# Altium PCB LED6432Clock.PcbDoc (part 5 of 6)
Units mm, origin at the board's own origin, x right, y up, seen from the top; angles counter-clockwise.
Board outline 152.4 x 101.6 mm, 2 copper layers (Top Layer, Bottom Layer); 48 components, 0 nets, 638 pads, 127 vias.
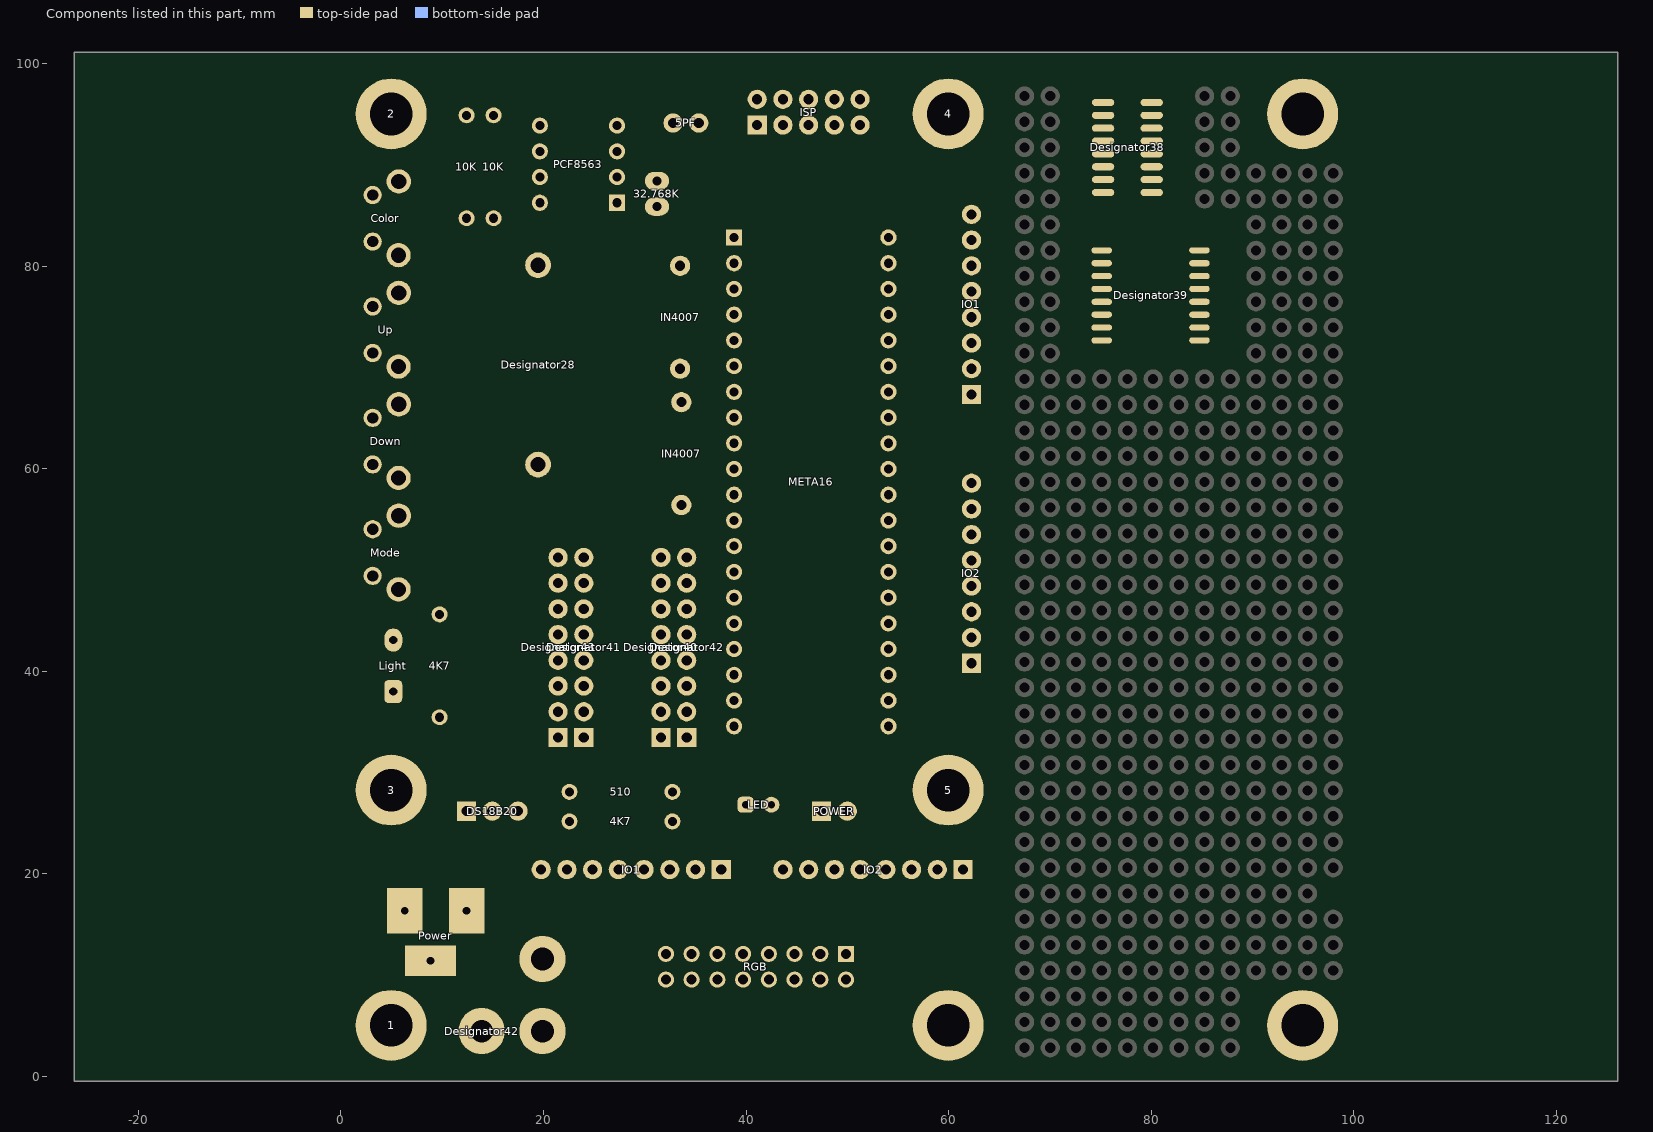
[diagram p5: the components of this part, seen from the top]

## Via types
v1: diameter 0.6, hole 0.3, Top Layer to Bottom Layer, 67 vias
v2: diameter 1.27, hole 0.711, Top Layer to Bottom Layer, 60 vias

## Nets (pads, with @x,y where several pads share a name; then routed paths per layer and width w, separated by ;. In a path a pad name is that pad's centre, name@x,y a point inside that pad or via, vN(x,y) a via of type N, cw(c..) or ccw(c..) an arc to the next point about the centre after c; other vN are vias at no path point) (continued)
copper on no net: (continued)
  Bottom Layer w0.16: 2.673,82.474 cw(c3.651,82.363) 3.396,83.314 ; 2.832,82.456 cw(c3.901,82.335) 3.623,83.374 ; 2.986,49.901 ccw(c2.629,51.09) 3.829,50.771 ; 2.991,82.438 cw(c4.152,82.307) 3.85,83.435 ; 3.019,50.073 ccw(c2.888,50.836) 3.635,50.635 ; 3.033,49.748 ccw(c2.726,50.768) 3.755,50.494 ; 3.046,49.915 ccw(c2.934,50.565) 3.571,50.394 ; 3.063,49.589 ccw(c2.548,50.868) 3.892,50.559 ; 3.079,49.595 ccw(c2.823,50.446) 3.682,50.218 ; 3.121,49.44 ccw(c2.324,50.999) 4.04,50.65 ; 3.123,49.441 ccw(c2.688,50.522) 3.823,50.26 ; 3.13,60.422 4.152,60.422 ; 3.13,82.422 3.13,82.617 4.265,83.751 ; 3.168,50.242 ccw(c3.179,50.489) 3.419,50.425 ccw(c3.67,50.358) 3.54,50.133 ; 3.194,49.298 ccw(c2.518,50.621) 3.974,50.325 ; 3.224,71.61 4.316,71.61 ; 3.257,49.422 3.257,50.333 ; 3.267,49.155 ccw(c2.711,50.242) 3.908,49.999 ; 3.298,49.173 ccw(c2.228,50.767) 4.121,50.453 ; 3.387,49.04 ccw(c2.511,50.344) 4.061,50.087 ; 3.476,48.908 ccw(c2.795,49.922) 4,49.722 ; 3.601,50.506 ccw(c4.553,50.25) 3.701,49.754 ; 3.752,50.485 ccw(c4.581,50.264) 3.84,49.834 ; 3.785,50.096 ccw(c4.093,50.025) 3.825,49.857 ; v1(12.698,70.543) 16.94,74.785 17.702,74.785 17.803,74.887 36.904,74.887 37.227,75.209 ; v1(14.501,76.081) 15.009,76.589 35.634,76.589 36.795,77.749 38.817,77.749 40.107,77.749 ; v1(14.704,62.339) 14.704,62.415 15.035,62.746 ; v1(17.422,46.083) 17.498,46.159 21.435,46.159 ; 19.64,91.338 20.656,91.338 ; 19.64,93.878 21.9,93.878 24.128,91.651 24.128,85.326 25.322,84.132 32.942,84.132 36.015,87.206 39.444,87.206 v1(51.534,87.206) ; 19.681,20.035 cw(c19.45,19.015) 20.46,19.286 ; 19.696,20.197 cw(c19.253,18.849) 20.627,19.2 ; 19.717,20.191 cw(c19.516,19.307) 20.391,19.542 ; 19.72,19.867 cw(c19.667,19.249) 20.267,19.41 ; 19.74,20.351 cw(c19.028,18.715) 20.77,19.103 ; 19.746,20.349 cw(c19.361,19.178) 20.555,19.482 ; 19.767,20.415 19.767,19.755 21.971,17.551 25.705,17.551 29.616,13.64 v1(40.919,13.64) ; 19.796,20.501 cw(c19.469,19.506) 20.483,19.765 ; 19.803,20.498 cw(c19.183,19.071) 20.702,19.41 ; 19.867,20.645 cw(c19.338,19.428) 20.633,19.717 ; 19.899,20.628 cw(c18.828,18.89) 20.84,19.235 ; 19.982,20.764 cw(c19.075,19.292) 20.78,19.584 ; 20.066,20.901 cw(c19.323,19.694) 20.72,19.933 ; 20.285,19.34 cw(c21.196,19.584) 20.381,20.058 ; 20.44,19.363 cw(c21.226,19.573) 20.521,19.98 ; 20.485,19.759 cw(c20.757,19.828) 20.515,19.971 ; 21.435,51.239 21.435,51.849 ; 22.307,20.415 22.307,19.374 ; v1(22.528,83.472) 23.417,83.472 24.28,82.608 v1(26.312,82.608) ; v1@23.671,54.668 24.458,54.668 35.101,54.668 37.006,56.573 37.006,58.377 37.361,58.732 40.739,58.732 v1(40.765,58.707) ; 24.847,20.415 24.847,19.653 25.781,18.72 ; v1(25.347,73.922) 37.717,73.922 37.768,73.972 39.723,73.972 43.63,73.972 v1(43.764,73.838) ; v1(27.1,78.875) 31.037,78.875 31.443,78.468 34.288,78.468 37.26,81.44 37.564,81.44 37.691,81.567 45.388,81.567 v1(45.515,81.44) ; 27.387,20.415 27.387,18.129 30.099,15.418 39.319,15.418 39.599,15.697 42.266,15.697 43.383,14.58 43.993,14.58 44.221,14.58 44.729,14.072 v1(48.311,14.072) ; v1@27.811,81.288 27.811,81.135 27.963,80.983 30.605,80.983 31.824,82.202 34.389,82.202 37.412,85.225 47.166,85.225 v1(47.597,84.793) ; v1(29.386,81.872) 30.427,81.872 31.367,82.812 33.805,82.812 36.904,85.91 v1(48.69,85.91) ; 29.927,20.415 29.927,17.024 29.927,16.402 30.353,15.977 39.065,15.977 39.294,16.205 42.799,16.205 43.637,15.367 ; v1@32.36,16.713 v1(32.467,16.821) 32.467,20.415 ; 33.678,36.339 cw(c34.932,35.408) 34.703,36.953 ; 33.787,36.215 cw(c34.869,35.546) 34.65,36.799 ; 33.806,36.244 cw(c35.371,35.083) 35.086,37.01 ; 33.923,36.131 cw(c35.275,35.295) 35.001,36.861 ; 33.935,36.148 cw(c35.81,34.757) 35.468,37.067 ; 34.033,19.69 cw(c35.53,19.439) 34.814,20.777 ; 34.055,36.04 cw(c35.175,35.471) 34.936,36.705 ; 34.059,36.047 cw(c35.681,35.044) 35.352,36.922 ; 34.087,20.012 cw(c35.336,19.802) 34.738,20.918 ; 34.135,35.999 35.151,35.999 ; 34.135,38.539 35.355,38.539 ; 34.135,41.079 35.177,41.079 ; 34.19,19.378 ccw(c33.888,20.77) 35.246,20.34 ; 34.198,35.968 cw(c35.545,35.283) 35.258,36.767 ; 34.34,35.895 cw(c35.915,35.096) 35.579,36.829 ; 34.349,35.914 cw(c35.427,35.481) 35.181,36.616 ; 34.46,19.437 ccw(c34.191,20.674) 35.398,20.292 ; 34.497,35.854 cw(c35.765,35.345) 35.476,36.68 ; 34.502,36.607 ccw(c34.994,37.422) 35.223,36.498 ; 34.509,35.886 cw(c35.336,35.636) 35.129,36.475 ; 34.585,36.744 ccw(c35.277,37.889) 35.598,36.59 ; 34.606,36.531 ccw(c35.085,37.072) 35.272,36.374 ; 34.606,36.731 ccw(c35.039,37.403) 35.208,36.622 ; 34.622,36.72 ccw(c34.766,36.933) 34.815,36.681 ; 34.626,12.09 34.626,11.475 35.255,10.846 ; 34.662,35.84 cw(c35.649,35.541) 35.402,36.542 ; 34.676,35.897 cw(c35.207,35.796) 35.067,36.319 ; 34.73,19.495 ccw(c34.495,20.578) 35.551,20.243 ; 34.833,35.867 cw(c35.485,35.744) 35.313,36.385 ; v1(34.874,18.237) 50.863,18.237 51.263,18.637 ; 34.969,36.247 ccw(c35.078,36.28) 35.108,36.17 ccw(c35.144,36.036) 35.005,36.031 ; 35.007,20.415 35.007,20.377 33.68,19.05 ; v1(36.498,82.735) 36.498,83.345 37.742,84.59 45.642,84.59 v1(46.556,83.675) ; v1(36.752,79.433) 36.091,79.433 34.745,78.087 34.745,77.833 16.076,77.833 10.158,83.751 4.265,83.751 ; v1(37.16,16.739) 35.204,16.739 34.519,16.739 33.68,17.577 33.68,19.05 ; v1(37.412,63.812) 10.869,63.812 8.862,61.806 8.862,61.603 8.862,55.938 3.257,50.333 ; 38.547,83.124 cw(c39.499,82.086) 39.56,83.493 ; 38.763,82.888 cw(c39.524,82.059) 39.573,83.183 ; 38.817,37.109 48.108,37.109 52.045,41.046 52.045,45.06 53.01,46.025 59.411,46.025 61.798,48.412 62.255,48.412 ; 38.817,39.649 46.203,39.649 46.558,40.005 48.311,40.005 50.902,42.596 50.902,48.235 51.232,48.565 58.674,48.565 61.062,50.952 ; 38.817,42.189 42.459,42.189 v1(42.644,42.375) 45.179,42.375 45.273,42.469 48.946,42.469 50.038,43.561 50.038,50.19 50.952,51.105 58.877,51.105 61.265,53.492 ; 38.817,44.729 38.911,44.635 v1(41.781,44.635) 41.799,44.653 47.879,44.653 48.844,44.653 48.87,44.679 48.87,53.086 49.403,53.619 57.937,53.619 60.35,56.032 ; 38.817,65.049 38.85,65.082 v1(42.924,65.082) ; 38.817,67.589 38.85,67.622 v1(43.711,67.622) ; 38.817,72.669 45.482,72.669 v1(45.616,72.804) 45.728,72.804 47.168,74.244 52.807,74.244 53.111,73.939 59.969,73.939 60.985,74.955 ; 38.817,80.289 38.861,80.246 v1(44.295,80.246) 46.805,80.246 47.752,81.194 47.752,81.534 48.184,81.966 52.375,81.966 52.781,81.559 60.452,81.559 ; 38.817,82.829 39.675,82.829 ; v1(38.862,17.323) 39.116,17.577 53.619,17.577 53.803,17.761 53.803,20.415 ; v1@38.9,17.369 ccw(c39.122,17.638) 39.303,17.339 ; v1@38.964,17.518 ccw(c39.139,17.854) 39.329,17.526 ; v1@39.002,17.492 ccw(c39.275,17.823) 39.496,17.456 ; v1@39.075,17.266 cw(c39.396,17.18) 39.23,17.468 ; v1(39.088,88.45) v1(53.846,88.45) ; 39.348,83.316 ccw(c39.657,83.599) 39.639,83.181 ; 39.567,83.338 ccw(c39.512,82.072) 38.655,83.006 cw(c39.868,81.683) 39.946,83.477 ; 39.706,12.09 39.675,12.059 39.675,10.82 ; v1(41.476,32.57) 53.465,32.57 54.057,33.163 ; v1(41.908,38.438) 37.59,38.438 35.151,35.999 ; 42.073,42.29 cw(c42.238,42.005) v1@42.482,42.227 ; 42.245,42.39 cw(c42.388,42.142) v1@42.6,42.334 ; 42.246,12.09 42.246,13.659 ; v1@42.431,42.429 cw(c42.123,42.508) 42.282,42.233 cw(c42.375,42.072) v1@42.498,42.211 ; v1@42.898,61.679 42.441,61.222 ; 42.922,13.99 cw(c42.753,13.359) v1@43.353,13.616 ; 42.945,20.415 43.643,20.415 ; 43.24,13.905 cw(c43.138,13.524) v1@43.501,13.679 ; 43.271,73.877 ccw(c43.384,74.074) v1@43.577,73.954 ; v1(43.409,13.64) 43.256,13.64 41.859,15.037 39.954,15.037 39.726,14.808 29.972,14.808 26.06,18.72 25.781,18.72 ; 43.414,73.795 ccw(c43.525,73.987) v1@43.713,73.87 ; v1(43.79,78.207) 40.564,78.207 40.107,77.749 ; v1(44.018,15.367) 43.637,15.367 ; v1(44.425,82.575) 45.39,82.575 45.695,82.271 47.371,82.271 49.505,84.404 58.293,84.404 v1(59.411,83.287) ; 45.033,81.473 ccw(c45.14,81.658) v1@45.324,81.55 ; 45.123,72.765 cw(c45.236,72.568) v1@45.429,72.688 ; 45.172,81.393 ccw(c45.278,81.577) v1@45.463,81.47 ; 45.266,72.847 cw(c45.377,72.655) v1@45.565,72.772 ; v1(45.337,43.467) 37.564,43.467 35.177,41.079 ; v1@45.523,72.839 cw(c45.867,72.71) 45.772,73.066 ; 45.617,41.048 cw(c45.838,40.681) v1@46.111,41.011 ; v1@45.672,72.783 cw(c46.224,72.577) 46.072,73.146 ; 45.784,40.978 cw(c45.974,40.65) v1@46.149,40.986 ; 45.81,41.164 cw(c45.991,40.865) v1@46.213,41.135 ; 45.883,41.036 ccw(c45.717,41.324) v1@46.039,41.238 ; v1(46.251,41.181) 45.997,40.927 37.742,40.927 35.355,38.539 ; v1(46.355,16.612) 46.38,16.586 v1@48.133,16.586 ; v1(46.683,76.843) 47.902,76.843 48.537,77.478 50.671,77.478 50.943,77.749 54.057,77.749 ; v1(47.75,75.115) 53.963,75.115 54.057,75.209 ; v1(47.928,73.312) 53.415,73.312 54.057,72.669 ; v1(48.69,81.008) 50.341,81.008 51.059,80.289 54.057,80.289 ; 48.937,11.308 cw(c50.09,10.999) 49.85,12.169 ; 49.004,11.558 cw(c50.032,11.283) 49.818,12.326 ; v1(49.071,55.024) 53.923,55.024 54.057,54.889 ; v1@49.071,78.494 v1(49.071,78.316) 46.464,78.316 45.499,77.351 40.765,77.351 39.901,76.487 38.047,76.487 36.802,76.487 36.142,75.827 16.127,75.827 13.206,72.906 12.672,72.906 11.301,71.534 11.301,67.572 4.152,60.422 ; 49.071,11.809 cw(c49.974,11.567) 49.786,12.482 ; 49.084,11.161 ccw(c48.775,12.314) 49.945,12.074 ; 49.334,11.228 ccw(c49.059,12.256) 50.102,12.042 ; 49.585,11.295 ccw(c49.343,12.198) 50.258,12.01 ; v1(50.95,52.205) 53.913,52.205 54.057,52.349 ; v1@51.128,79.129 v1(51.026,79.027) 37.895,79.027 37.437,79.027 37.133,78.722 36.472,78.722 35.304,77.554 34.999,77.249 9.955,77.249 9.65,76.944 4.316,71.61 ; v1(51.153,85.885) 50.417,86.622 50.417,86.672 39.825,86.672 39.723,86.571 36.472,86.571 33.348,83.447 24.458,83.447 22.959,84.945 22.959,89.035 20.656,91.338 ; 51.263,20.415 51.263,18.637 ; 54.057,34.569 54.057,33.163 ; 56.979,20.099 cw(c57.279,19.949) 57.359,20.275 ; 56.979,20.732 ccw(c57.279,20.882) 57.359,20.556 ; 57.038,20.267 cw(c57.392,20.191) 57.306,20.543 ; 57.038,20.564 ccw(c57.392,20.64) 57.306,20.288 ; 57.122,20.027 cw(c57.463,19.857) 57.554,20.228 cw(c57.669,20.699) 57.194,20.598 ; 57.122,20.804 ccw(c57.463,20.974) 57.554,20.603 ccw(c57.669,20.132) 57.194,20.233 ; 57.199,20.255 cw(c57.35,20.227) 57.377,20.378 cw(c57.415,20.59) 57.202,20.556 ; 57.199,20.576 ccw(c57.35,20.604) 57.377,20.453 ccw(c57.415,20.24) 57.202,20.275 ; 59.519,20.099 cw(c59.819,19.949) 59.899,20.275 ; 59.519,20.732 ccw(c59.819,20.882) 59.899,20.556 ; 59.578,20.267 cw(c59.932,20.191) 59.846,20.543 ; 59.578,20.564 ccw(c59.932,20.64) 59.846,20.288 ; 59.662,20.027 cw(c60.003,19.857) 60.094,20.228 cw(c60.209,20.699) 59.734,20.598 ; 59.662,20.804 ccw(c60.003,20.974) 60.094,20.603 ccw(c60.209,20.132) 59.734,20.233 ; 59.739,20.255 cw(c59.89,20.227) 59.917,20.378 cw(c59.955,20.59) 59.742,20.556 ; 59.739,20.576 ccw(c59.89,20.604) 59.917,20.453 ccw(c59.955,20.24) 59.742,20.275 ; 60.796,52.894 cw(c61.123,51.596) 61.81,52.745 ; 60.821,47.322 ccw(c60.375,49.006) 62.036,48.482 ; 60.827,52.661 ccw(c60.491,54.368) 62.049,53.595 ; 60.925,52.424 ccw(c60.58,54.732) 62.456,53.344 ; 60.928,52.809 ccw(c60.637,54.124) 61.892,53.634 ; 60.999,52.945 ccw(c60.749,53.934) 61.728,53.647 ; 61.053,52.569 ccw(c60.724,54.42) 62.332,53.446 ; 61.102,47.397 ccw(c60.703,48.903) 62.189,48.433 ; 61.103,53.114 ccw(c60.942,53.715) 61.555,53.611 ; 61.143,53.124 cw(c61.318,52.472) 61.775,52.969 ; 61.146,52.724 ccw(c60.858,54.186) 62.193,53.524 ; 61.17,52.988 cw(c61.403,52.065) 61.892,52.883 ; 61.175,47.573 ccw(c60.866,48.727) 62.031,48.463 ; 61.184,52.865 cw(c61.357,52.084) 61.788,52.759 ; 61.2,47.342 ccw(c60.861,49.127) 62.478,48.298 ; 61.203,47.74 cw(c61.413,46.954) 61.82,47.659 ccw(c61.677,47.411) 61.603,47.688 ; 61.221,52.873 ccw(c60.973,53.993) 62.041,53.576 ; 61.247,47.898 cw(c62.244,47.63) 62.259,48.662 ; 61.27,53.014 ccw(c61.061,53.843) 61.881,53.602 ; 61.276,47.76 ccw(c61.069,48.536) 61.867,48.453 ; 61.301,48.096 cw(c62.247,47.842) 62.261,48.822 ; 61.307,52.481 ccw(c61.019,54.407) 62.585,53.249 ; 61.314,53.33 ccw(c61.288,53.426) 61.387,53.433 ; 61.344,53.178 ccw(c61.212,53.669) 61.713,53.584 ; 61.383,47.471 ccw(c61.031,48.799) 62.341,48.385 ; 61.401,52.631 ccw(c61.127,54.176) 62.469,53.363 ; 61.423,20.415 58.883,20.415 56.343,20.415 56.343,17.532 55.728,16.916 50.394,16.916 49.866,16.389 49.866,12.09 48.622,10.846 35.255,10.846 ; 61.431,47.641 ccw(c61.158,48.661) 62.187,48.428 ; 61.465,52.787 ccw(c61.225,54.004) 62.336,53.452 ; 61.501,47.82 ccw(c61.316,48.51) 62.027,48.436 ; 61.522,47.403 ccw(c61.23,48.938) 62.62,48.225 ; 61.577,52.809 cw(c61.627,52.556) 61.771,52.77 ; 61.665,47.546 ccw(c61.36,48.695) 62.494,48.337 ; 61.689,52.538 ccw(c61.458,54.082) 62.714,53.153 ; 61.843,47.464 ccw(c61.599,48.749) 62.763,48.153 ; 62.255,50.952 61.062,50.952 ; 62.255,53.492 61.265,53.492 ; 62.255,56.032 60.35,56.032 ; 62.255,74.955 60.985,74.955 ; 62.255,77.495 61.417,77.495 60.427,76.505 ; 62.255,82.575 61.468,82.575 60.452,81.559 ; 62.255,85.115 62.205,85.065 49.327,85.065 47.142,82.88 46.025,82.88 44.958,83.947 40.792,83.947 ; 3.257,50.333 ccw(c3.383,50.333) 3.349,50.213 cw(c3.383,50.333) 3.257,50.333 ; 4.152,60.422 cw(c4.152,60.648) 3.931,60.599 ccw(c4.152,60.648) 4.152,60.422 ; 4.152,60.422 ccw(c4.152,60.197) 3.931,60.245 cw(c4.152,60.197) 4.152,60.422 ; 4.265,83.751 ccw(c5.144,82.872) 3.931,82.601 cw(c5.144,82.872) 4.265,83.751 ; 4.316,71.61 cw(c4.316,72.218) 3.811,71.879 ccw(c4.316,72.218) 4.316,71.61 ; 4.316,71.61 ccw(c4.316,71.229) 3.94,71.29 cw(c4.316,71.229) 4.316,71.61 ; 13.073,70.919 cw(c12.698,71.295) 12.698,70.763 ccw(c12.698,71.295) 13.073,70.919 ; 13.073,70.919 ccw(c13.449,70.543) 12.918,70.543 cw(c13.449,70.543) 13.073,70.919 ; 14.877,76.456 cw(c14.501,76.832) 14.501,76.301 ccw(c14.501,76.832) 14.877,76.456 ; 14.877,76.456 ccw(c15.252,76.081) 14.721,76.081 cw(c15.252,76.081) 14.877,76.456 ; 15.035,62.746 ccw(c15.326,62.454) 14.921,62.379 cw(c15.326,62.454) 15.035,62.746 ; 15.035,62.746 35.837,62.746 37.361,61.222 42.441,61.222 ; 19.335,46.159 cw(c19.335,44.059) 20.82,45.544 ccw(c19.335,44.059) 19.335,46.159 ; 19.335,46.159 ccw(c19.335,48.26) 20.82,46.775 cw(c19.335,48.26) 19.335,46.159 ; 19.721,46.159 cw(c19.721,44.445) 20.933,45.657 ccw(c19.721,44.445) 19.721,46.159 ; 19.721,46.159 ccw(c19.721,47.873) 20.933,46.661 cw(c19.721,47.873) 19.721,46.159 ; 20.108,46.159 cw(c20.108,44.832) 21.046,45.77 ccw(c20.108,44.832) 20.108,46.159 ; 20.108,46.159 ccw(c20.108,47.487) 21.046,46.548 cw(c20.108,47.487) 20.108,46.159 ; 20.606,93.878 cw(c20.606,94.844) 19.923,94.161 ccw(c20.606,94.844) 20.606,93.878 ; 20.606,93.878 ccw(c20.606,92.913) 19.923,93.596 cw(c20.606,92.913) 20.606,93.878 ; 20.656,91.338 cw(c20.656,91.694) 20.32,91.576 ccw(c20.656,91.694) 20.656,91.338 ; 20.656,91.338 ccw(c20.656,90.983) 20.32,91.1 cw(c20.656,90.983) 20.656,91.338 ; 20.992,93.878 cw(c20.992,95.23) 20.036,94.274 ccw(c20.992,95.23) 20.992,93.878 ; 20.992,93.878 ccw(c20.992,92.526) 20.036,93.482 cw(c20.992,92.526) 20.992,93.878 ; 21.379,93.878 cw(c21.379,95.617) 20.15,94.388 ccw(c21.379,95.617) 21.379,93.878 ; 21.379,93.878 ccw(c21.379,92.14) 20.15,93.369 cw(c21.379,92.14) 21.379,93.878 ; 22.307,19.374 cw(c22.496,19.374) 22.462,19.559 ccw(c22.496,19.374) 22.307,19.374 ; 22.307,19.374 ccw(c22.119,19.374) 22.153,19.559 cw(c22.119,19.374) 22.307,19.374 ; 22.307,19.374 23.622,18.059 25.933,18.059 29.82,14.173 40.056,14.173 40.361,14.478 41.427,14.478 42.246,13.659 ; 23.059,83.472 cw(c23.059,84.003) 22.683,83.628 ccw(c23.059,84.003) 23.059,83.472 ; 23.059,83.472 ccw(c23.059,82.941) 22.683,83.316 cw(c23.059,82.941) 23.059,83.472 ; 25.781,18.72 cw(c26.531,19.47) 25.606,19.99 ccw(c26.531,19.47) 25.781,18.72 ; 25.781,82.608 cw(c25.781,82.077) 26.157,82.453 ccw(c25.781,82.077) 25.781,82.608 ; 25.781,82.608 ccw(c25.781,83.14) 26.157,82.764 cw(c25.781,83.14) 25.781,82.608 ; 25.878,73.922 cw(c25.878,74.453) 25.503,74.077 ccw(c25.878,74.453) 25.878,73.922 ; 25.878,73.922 ccw(c25.878,73.39) 25.503,73.766 cw(c25.878,73.39) 25.878,73.922 ; 27.387,18.315 cw(c29.488,18.315) 28.003,19.8 ccw(c29.488,18.315) 27.387,18.315 ; 27.387,18.315 ccw(c25.287,18.315) 26.772,19.8 cw(c25.287,18.315) 27.387,18.315 ; 27.387,18.701 cw(c29.101,18.701) 27.889,19.913 ccw(c29.101,18.701) 27.387,18.701 ; 27.387,18.701 ccw(c25.673,18.701) 26.885,19.913 cw(c25.673,18.701) 27.387,18.701 ; 27.387,19.088 cw(c28.715,19.088) 27.776,20.026 ccw(c28.715,19.088) 27.387,19.088 ; 27.387,19.088 ccw(c26.06,19.088) 26.998,20.026 cw(c26.06,19.088) 27.387,19.088 ; 27.631,78.875 cw(c27.631,79.406) 27.255,79.03 ccw(c27.631,79.406) 27.631,78.875 ; 27.631,78.875 ccw(c27.631,78.343) 27.255,78.719 cw(c27.631,78.343) 27.631,78.875 ; 29.917,81.872 cw(c29.917,82.403) 29.541,82.027 ccw(c29.917,82.403) 29.917,81.872 ; 29.917,81.872 ccw(c29.917,81.341) 29.541,81.716 cw(c29.917,81.341) 29.917,81.872 ; 29.927,18.315 cw(c32.028,18.315) 30.543,19.8 ccw(c32.028,18.315) 29.927,18.315 ; 29.927,18.315 ccw(c27.827,18.315) 29.312,19.8 cw(c27.827,18.315) 29.927,18.315 ; 29.927,18.701 cw(c31.641,18.701) 30.429,19.913 ccw(c31.641,18.701) 29.927,18.701 ; 29.927,18.701 ccw(c28.213,18.701) 29.425,19.913 cw(c28.213,18.701) 29.927,18.701 ; 29.927,19.088 cw(c31.255,19.088) 30.316,20.026 ccw(c31.255,19.088) 29.927,19.088 ; 29.927,19.088 ccw(c28.6,19.088) 29.538,20.026 cw(c28.6,19.088) 29.927,19.088 ; 32.467,17.352 cw(c31.936,17.352) 32.312,16.977 ccw(c31.936,17.352) 32.467,17.352 ; 32.467,17.352 ccw(c32.999,17.352) 32.623,16.977 cw(c32.999,17.352) 32.467,17.352 ; 32.467,18.315 cw(c34.568,18.315) 33.083,19.8 ccw(c34.568,18.315) 32.467,18.315 ; 32.467,18.315 ccw(c30.367,18.315) 31.852,19.8 cw(c30.367,18.315) 32.467,18.315 ; 32.467,18.701 cw(c34.181,18.701) 32.969,19.913 ccw(c34.181,18.701) 32.467,18.701 ; 32.467,18.701 ccw(c30.753,18.701) 31.965,19.913 cw(c30.753,18.701) 32.467,18.701 ; 32.467,19.088 cw(c33.795,19.088) 32.856,20.026 ccw(c33.795,19.088) 32.467,19.088 ; 32.467,19.088 ccw(c31.14,19.088) 32.078,20.026 cw(c31.14,19.088) 32.467,19.088 ; 33.68,19.05 cw(c34.884,17.847) 34.965,19.546 ccw(c34.884,17.847) 33.68,19.05 ; 33.68,19.05 ccw(c32.55,20.18) 34.141,20.333 cw(c32.55,20.18) 33.68,19.05 ; 35.13,38.539 cw(c35.13,38.882) 34.807,38.77 ccw(c35.13,38.882) 35.13,38.539 ; 35.13,38.539 ccw(c35.13,38.197) 34.807,38.309 cw(c35.13,38.197) 35.13,38.539 ; 35.151,35.999 cw(c35.151,36.158) 34.995,36.133 ccw(c35.151,36.158) 35.151,35.999 ; 35.151,35.999 ccw(c35.151,35.841) 34.995,35.866 cw(c35.151,35.841) 35.151,35.999 ; 35.177,41.079 cw(c35.177,41.268) 34.992,41.234 ccw(c35.177,41.268) 35.177,41.079 ; 35.177,41.079 ccw(c35.177,40.891) 34.992,40.925 cw(c35.177,40.891) 35.177,41.079 ; 35.255,10.846 cw(c35.692,11.282) 35.2,11.655 ccw(c35.692,11.282) 35.255,10.846 ; 35.355,38.539 cw(c35.355,38.959) 34.958,38.822 ccw(c35.355,38.959) 35.355,38.539 ; 35.355,38.539 ccw(c35.355,38.12) 34.958,38.257 cw(c35.355,38.12) 35.355,38.539 ; 35.405,18.237 cw(c35.405,18.768) 35.03,18.393 ccw(c35.405,18.768) 35.405,18.237 ; 35.405,18.237 ccw(c35.405,17.706) 35.03,18.082 cw(c35.405,17.706) 35.405,18.237 ; 36.22,79.433 cw(c36.22,78.902) 36.596,79.278 ccw(c36.22,78.902) 36.22,79.433 ; 36.22,79.433 ccw(c36.22,79.965) 36.596,79.589 cw(c36.22,79.965) 36.22,79.433 ; 36.498,83.267 cw(c35.966,83.267) 36.342,82.891 ccw(c35.966,83.267) 36.498,83.267 ; 36.498,83.267 ccw(c37.029,83.267) 36.653,82.891 cw(c37.029,83.267) 36.498,83.267 ; 36.629,16.739 cw(c36.629,16.207) 37.005,16.583 ccw(c36.629,16.207) 36.629,16.739 ; 36.629,16.739 ccw(c36.629,17.27) 37.005,16.894 cw(c36.629,17.27) 36.629,16.739 ; 36.881,63.812 cw(c36.881,63.281) 37.256,63.657 ccw(c36.881,63.281) 36.881,63.812 ; 36.881,63.812 ccw(c36.881,64.344) 37.256,63.968 cw(c36.881,64.344) 36.881,63.812 ; 37.079,77.749 cw(c37.079,76.011) 38.308,77.24 ccw(c37.079,76.011) 37.079,77.749 ; 37.079,77.749 ccw(c37.079,79.488) 38.308,78.259 cw(c37.079,79.488) 37.079,77.749 ; 37.227,75.209 cw(c37.227,73.812) 38.276,74.734 ccw(c37.227,73.812) 37.227,75.209 ; 37.227,75.209 ccw(c37.227,76.607) 38.276,75.685 cw(c37.227,76.607) 37.227,75.209 ; 37.227,75.209 38.817,75.209 46.457,75.209 47.422,76.175 52.883,76.175 53.213,76.505 60.427,76.505 ; 37.465,77.749 cw(c37.465,76.397) 38.421,77.353 ccw(c37.465,76.397) 37.465,77.749 ; 37.465,77.749 ccw(c37.465,79.101) 38.421,78.145 cw(c37.465,79.101) 37.465,77.749 ; 37.58,75.209 cw(c37.58,74.123) 38.397,74.84 ccw(c37.58,74.123) 37.58,75.209 ; 37.58,75.209 ccw(c37.58,76.296) 38.397,75.579 cw(c37.58,76.296) 37.58,75.209 ; 37.852,77.749 cw(c37.852,76.784) 38.535,77.467 ccw(c37.852,76.784) 37.852,77.749 ; 37.852,77.749 ccw(c37.852,78.715) 38.535,78.032 cw(c37.852,78.715) 37.852,77.749 ; 37.934,75.209 cw(c37.934,74.433) 38.517,74.945 ccw(c37.934,74.433) 37.934,75.209 ; 37.934,75.209 ccw(c37.934,75.986) 38.517,75.473 cw(c37.934,75.986) 37.934,75.209 ; 39.62,88.45 cw(c39.62,88.982) 39.244,88.606 ccw(c39.62,88.982) 39.62,88.45 ; 39.62,88.45 ccw(c39.62,87.919) 39.244,88.295 cw(c39.62,87.919) 39.62,88.45 ; 39.675,10.82 cw(c40.404,10.82) 40.053,11.459 ccw(c40.404,10.82) 39.675,10.82 ; 39.675,10.82 ccw(c38.879,10.82) 39.313,11.487 cw(c38.879,10.82) 39.675,10.82 ; 39.675,82.829 cw(c39.675,82.98) 39.527,82.954 ccw(c39.675,82.98) 39.675,82.829 ; 39.675,82.829 ccw(c39.675,82.679) 39.527,82.705 cw(c39.675,82.679) 39.675,82.829 ; 39.675,82.829 40.792,83.947 ; 39.783,37.109 cw(c39.783,38.075) 39.1,37.392 ccw(c39.783,38.075) 39.783,37.109 ; 39.783,37.109 ccw(c39.783,36.144) 39.1,36.827 cw(c39.783,36.144) 39.783,37.109 ; 39.783,39.649 cw(c39.783,40.615) 39.1,39.932 ccw(c39.783,40.615) 39.783,39.649 ; 39.783,39.649 ccw(c39.783,38.684) 39.1,39.367 cw(c39.783,38.684) 39.783,39.649 ; 39.783,42.189 cw(c39.783,43.155) 39.1,42.472 ccw(c39.783,43.155) 39.783,42.189 ; 39.783,42.189 ccw(c39.783,41.224) 39.1,41.907 cw(c39.783,41.224) 39.783,42.189 ; 39.783,72.669 cw(c39.783,73.635) 39.1,72.952 ccw(c39.783,73.635) 39.783,72.669 ; 39.783,72.669 ccw(c39.783,71.704) 39.1,72.387 cw(c39.783,71.704) 39.783,72.669 ; 39.783,75.209 cw(c39.783,76.175) 39.1,75.492 ccw(c39.783,76.175) 39.783,75.209 ; 39.783,75.209 ccw(c39.783,74.244) 39.1,74.927 cw(c39.783,74.244) 39.783,75.209 ; 39.82,77.749 cw(c39.82,78.367) 39.294,78.043 ccw(c39.82,78.367) 39.82,77.749 ; 39.82,77.749 ccw(c39.82,77.132) 39.294,77.456 cw(c39.82,77.132) 39.82,77.749 ; 40.107,77.749 cw(c40.107,78.544) 39.43,78.127 ccw(c40.107,78.544) 40.107,77.749 ; 40.107,77.749 ccw(c40.107,76.955) 39.43,77.372 cw(c40.107,76.955) 40.107,77.749 ; 40.169,37.109 cw(c40.169,38.461) 39.213,37.505 ccw(c40.169,38.461) 40.169,37.109 ; 40.169,37.109 ccw(c40.169,35.757) 39.213,36.713 cw(c40.169,35.757) 40.169,37.109 ; 40.169,39.649 cw(c40.169,41.001) 39.213,40.045 ccw(c40.169,41.001) 40.169,39.649 ; 40.169,39.649 ccw(c40.169,38.297) 39.213,39.253 cw(c40.169,38.297) 40.169,39.649 ; 40.169,42.189 cw(c40.169,43.541) 39.213,42.585 ccw(c40.169,43.541) 40.169,42.189 ; 40.169,42.189 ccw(c40.169,40.837) 39.213,41.793 cw(c40.169,40.837) 40.169,42.189 ; 40.169,72.669 cw(c40.169,74.021) 39.213,73.065 ccw(c40.169,74.021) 40.169,72.669 ; 40.169,72.669 ccw(c40.169,71.317) 39.213,72.273 cw(c40.169,71.317) 40.169,72.669 ; 40.169,75.209 cw(c40.169,76.561) 39.213,75.605 ccw(c40.169,76.561) 40.169,75.209 ; 40.169,75.209 ccw(c40.169,73.857) 39.213,74.813 cw(c40.169,73.857) 40.169,75.209 ; 40.388,13.64 cw(c40.388,13.109) 40.764,13.484 ccw(c40.388,13.109) 40.388,13.64 ; 40.388,13.64 ccw(c40.388,14.171) 40.764,13.795 cw(c40.388,14.171) 40.388,13.64 ; 40.556,37.109 cw(c40.556,38.848) 39.327,37.619 ccw(c40.556,38.848) 40.556,37.109 ; 40.556,37.109 ccw(c40.556,35.371) 39.327,36.6 cw(c40.556,35.371) 40.556,37.109 ; 40.556,39.649 cw(c40.556,41.388) 39.327,40.159 ccw(c40.556,41.388) 40.556,39.649 ; 40.556,39.649 ccw(c40.556,37.911) 39.327,39.14 cw(c40.556,37.911) 40.556,39.649 ; 40.556,42.189 cw(c40.556,43.928) 39.327,42.699 ccw(c40.556,43.928) 40.556,42.189 ; 40.556,42.189 ccw(c40.556,40.451) 39.327,41.68 cw(c40.556,40.451) 40.556,42.189 ; 40.556,72.669 cw(c40.556,74.408) 39.327,73.179 ccw(c40.556,74.408) 40.556,72.669 ; 40.556,72.669 ccw(c40.556,70.931) 39.327,72.16 cw(c40.556,70.931) 40.556,72.669 ; 40.556,75.209 cw(c40.556,76.948) 39.327,75.719 ccw(c40.556,76.948) 40.556,75.209 ; 40.556,75.209 ccw(c40.556,73.471) 39.327,74.7 cw(c40.556,73.471) 40.556,75.209 ; 40.792,83.947 cw(c39.558,85.181) 39.034,83.516 ccw(c39.558,85.181) 40.792,83.947 ; 41.25,44.635 cw(c41.25,44.104) 41.625,44.48 ccw(c41.25,44.104) 41.25,44.635 ; 41.25,44.635 ccw(c41.25,45.167) 41.625,44.791 cw(c41.25,45.167) 41.25,44.635 ; 41.377,38.438 cw(c41.377,37.907) 41.752,38.282 ccw(c41.377,37.907) 41.377,38.438 ; 41.377,38.438 ccw(c41.377,38.969) 41.752,38.593 cw(c41.377,38.969) 41.377,38.438 ; 42.007,32.57 cw(c42.007,33.102) 41.632,32.726 ccw(c42.007,33.102) 42.007,32.57 ; 42.007,32.57 ccw(c42.007,32.039) 41.632,32.415 cw(c42.007,32.039) 42.007,32.57 ; 42.246,12.962 cw(c41.497,12.962) 41.986,12.394 ccw(c41.497,12.962) 42.246,12.962 ; 42.246,12.962 ccw(c42.996,12.962) 42.507,12.394 cw(c42.996,12.962) 42.246,12.962 ; 42.246,13.31 cw(c41.198,13.31) 41.881,12.515 ccw(c41.198,13.31) 42.246,13.31 ; 42.246,13.31 ccw(c43.295,13.31) 42.611,12.515 cw(c43.295,13.31) 42.246,13.31 ; 42.246,13.659 cw(c40.898,13.659) 41.777,12.636 ccw(c40.898,13.659) 42.246,13.659 ; 42.246,13.659 ccw(c43.595,13.659) 42.716,12.636 cw(c43.595,13.659) 42.246,13.659 ; 42.393,65.082 cw(c42.393,64.551) 42.768,64.927 ccw(c42.393,64.551) 42.393,65.082 ; 42.393,65.082 ccw(c42.393,65.614) 42.768,65.238 cw(c42.393,65.614) 42.393,65.082 ; 42.441,61.222 cw(c42.832,60.83) 42.861,61.383 ccw(c42.832,60.83) 42.441,61.222 ; 43.176,42.375 cw(c43.176,42.906) 42.8,42.53 ccw(c43.176,42.906) 43.176,42.375 ; 43.176,42.375 ccw(c43.176,41.844) 42.8,42.219 cw(c43.176,41.844) 43.176,42.375 ; 43.18,67.622 cw(c43.18,67.091) 43.556,67.467 ccw(c43.18,67.091) 43.18,67.622 ; 43.18,67.622 ccw(c43.18,68.154) 43.556,67.778 cw(c43.18,68.154) 43.18,67.622 ; 43.258,78.207 cw(c43.258,77.675) 43.634,78.051 ccw(c43.258,77.675) 43.258,78.207 ; 43.258,78.207 ccw(c43.258,78.738) 43.634,78.362 cw(c43.258,78.738) 43.258,78.207 ; 43.637,15.367 cw(c43.637,15.147) 43.828,15.257 ccw(c43.637,15.147) 43.637,15.367 ; 43.637,15.367 ccw(c43.637,15.587) 43.828,15.477 cw(c43.637,15.587) 43.637,15.367 ; 43.764,80.246 cw(c43.764,79.715) 44.14,80.091 ccw(c43.764,79.715) 43.764,80.246 ; 43.764,80.246 ccw(c43.764,80.777) 44.14,80.402 cw(c43.764,80.777) 43.764,80.246 ; 44.806,43.467 cw(c44.806,42.936) 45.181,43.311 ccw(c44.806,42.936) 44.806,43.467 ; 44.806,43.467 ccw(c44.806,43.998) 45.181,43.623 cw(c44.806,43.998) 44.806,43.467 ; 44.827,80.246 cw(c44.827,80.777) 44.451,80.402 ccw(c44.827,80.777) 44.827,80.246 ; 44.827,80.246 ccw(c44.827,79.715) 44.451,80.091 cw(c44.827,79.715) 44.827,80.246 ; 44.956,82.575 cw(c44.956,83.107) 44.58,82.731 ccw(c44.956,83.107) 44.956,82.575 ; 44.956,82.575 ccw(c44.956,82.044) 44.58,82.42 cw(c44.956,82.044) 44.956,82.575 ; 46.18,84.051 cw(c45.805,83.675) 46.336,83.675 ccw(c45.805,83.675) 46.18,84.051 ; 46.18,84.051 ccw(c46.556,84.426) 46.556,83.895 cw(c46.556,84.426) 46.18,84.051 ; 47.214,76.843 cw(c47.214,77.374) 46.839,76.998 ccw(c47.214,77.374) 47.214,76.843 ; 47.214,76.843 ccw(c47.214,76.311) 46.839,76.687 cw(c47.214,76.311) 47.214,76.843 ; 47.222,85.168 cw(c46.846,84.793) 47.377,84.793 ccw(c46.846,84.793) 47.222,85.168 ; 47.222,85.168 ccw(c47.597,85.544) 47.597,85.013 cw(c47.597,85.544) 47.222,85.168 ; 47.78,14.072 cw(c47.78,13.54) 48.155,13.916 ccw(c47.78,13.54) 47.78,14.072 ; 47.78,14.072 ccw(c47.78,14.603) 48.155,14.227 cw(c47.78,14.603) 47.78,14.072 ; 48.158,85.91 cw(c48.158,85.379) 48.534,85.755 ccw(c48.158,85.379) 48.158,85.91 ; 48.158,85.91 ccw(c48.158,86.442) 48.534,86.066 cw(c48.158,86.442) 48.158,85.91 ; 48.281,75.115 cw(c48.281,75.647) 47.905,75.271 ccw(c48.281,75.647) 48.281,75.115 ; 48.281,75.115 ccw(c48.281,74.584) 47.905,74.96 cw(c48.281,74.584) 48.281,75.115 ; 48.459,73.312 cw(c48.459,73.843) 48.083,73.468 ccw(c48.459,73.843) 48.459,73.312 ; 48.459,73.312 ccw(c48.459,72.781) 48.083,73.156 cw(c48.459,72.781) 48.459,73.312 ; 48.539,78.316 cw(c48.539,77.785) 48.915,78.16 ccw(c48.539,77.785) 48.539,78.316 ; 48.539,78.316 ccw(c48.539,78.847) 48.915,78.471 cw(c48.539,78.847) 48.539,78.316 ; 48.637,10.861 cw(c49.866,9.632) 49.866,11.37 ccw(c49.866,9.632) 48.637,10.861 ; 48.637,10.861 ccw(c47.408,12.09) 49.146,12.09 cw(c47.408,12.09) 48.637,10.861 ; 48.91,11.134 cw(c49.866,10.178) 49.866,11.53 ccw(c49.866,10.178) 48.91,11.134 ; 48.91,11.134 ccw(c47.954,12.09) 49.306,12.09 cw(c47.954,12.09) 48.91,11.134 ; 49.184,11.408 cw(c49.866,10.725) 49.866,11.69 ccw(c49.866,10.725) 49.184,11.408 ; 49.184,11.408 ccw(c48.501,12.09) 49.466,12.09 cw(c48.501,12.09) 49.184,11.408 ; 49.221,81.008 cw(c49.221,81.539) 48.845,81.164 ccw(c49.221,81.539) 49.221,81.008 ; 49.221,81.008 ccw(c49.221,80.477) 48.845,80.853 cw(c49.221,80.477) 49.221,81.008 ; 49.602,55.024 cw(c49.602,55.555) 49.226,55.18 ccw(c49.602,55.555) 49.602,55.024 ; 49.602,55.024 ccw(c49.602,54.493) 49.226,54.868 cw(c49.602,54.493) 49.602,55.024 ; 49.866,13.056 cw(c48.901,13.056) 49.584,12.373 ccw(c48.901,13.056) 49.866,13.056 ; 49.866,13.056 ccw(c50.832,13.056) 50.149,12.373 cw(c50.832,13.056) 49.866,13.056 ; 49.866,13.442 cw(c48.514,13.442) 49.47,12.486 ccw(c48.514,13.442) 49.866,13.442 ; 49.866,13.442 ccw(c51.218,13.442) 50.262,12.486 cw(c51.218,13.442) 49.866,13.442 ; 49.866,13.829 cw(c48.128,13.829) 49.357,12.6 ccw(c48.128,13.829) 49.866,13.829 ; 49.866,13.829 ccw(c51.605,13.829) 50.376,12.6 cw(c51.605,13.829) 49.866,13.829 ; 50.495,79.027 cw(c50.495,78.496) 50.871,78.871 ccw(c50.495,78.496) 50.495,79.027 ; 50.495,79.027 ccw(c50.495,79.558) 50.871,79.183 cw(c50.495,79.558) 50.495,79.027 ; 50.778,86.261 cw(c50.402,85.885) 50.933,85.885 ccw(c50.402,85.885) 50.778,86.261 ; 50.778,86.261 ccw(c51.153,86.636) 51.153,86.105 cw(c51.153,86.636) 50.778,86.261 ; 51.003,87.206 cw(c51.003,86.675) 51.379,87.05 ccw(c51.003,86.675) 51.003,87.206 ; 51.003,87.206 ccw(c51.003,87.737) 51.379,87.361 cw(c51.003,87.737) 51.003,87.206 ; 51.263,18.637 cw(c52.645,18.637) 51.797,19.728 ccw(c52.645,18.637) 51.263,18.637 ; 51.263,18.637 ccw(c49.882,18.637) 50.73,19.728 cw(c49.882,18.637) 51.263,18.637 ; 51.263,18.964 cw(c52.391,18.964) 51.699,19.855 ccw(c52.391,18.964) 51.263,18.964 ; 51.263,18.964 ccw(c50.136,18.964) 50.828,19.855 cw(c50.136,18.964) 51.263,18.964 ; 51.263,19.291 cw(c52.137,19.291) 51.601,19.981 ccw(c52.137,19.291) 51.263,19.291 ; 51.263,19.291 ccw(c50.39,19.291) 50.926,19.981 cw(c50.39,19.291) 51.263,19.291 ; 51.481,52.205 cw(c51.481,52.736) 51.106,52.36 ccw(c51.481,52.736) 51.481,52.205 ; 51.481,52.205 ccw(c51.481,51.673) 51.106,52.049 cw(c51.481,51.673) 51.481,52.205 ; 52.319,77.749 cw(c52.319,76.011) 53.548,77.24 ccw(c52.319,76.011) 52.319,77.749 ; 52.319,77.749 ccw(c52.319,79.488) 53.548,78.259 cw(c52.319,79.488) 52.319,77.749 ; 52.319,80.289 cw(c52.319,78.551) 53.548,79.78 ccw(c52.319,78.551) 52.319,80.289 ; 52.319,80.289 ccw(c52.319,82.028) 53.548,80.799 cw(c52.319,82.028) 52.319,80.289 ; 52.705,77.749 cw(c52.705,76.397) 53.661,77.353 ccw(c52.705,76.397) 52.705,77.749 ; 52.705,77.749 ccw(c52.705,79.101) 53.661,78.145 cw(c52.705,79.101) 52.705,77.749 ; 52.705,80.289 cw(c52.705,78.937) 53.661,79.893 ccw(c52.705,78.937) 52.705,80.289 ; 52.705,80.289 ccw(c52.705,81.641) 53.661,80.685 cw(c52.705,81.641) 52.705,80.289 ; 53.092,77.749 cw(c53.092,76.784) 53.775,77.467 ccw(c53.092,76.784) 53.092,77.749 ; 53.092,77.749 ccw(c53.092,78.715) 53.775,78.032 cw(c53.092,78.715) 53.092,77.749 ; 53.092,80.289 cw(c53.092,79.324) 53.775,80.007 ccw(c53.092,79.324) 53.092,80.289 ; 53.092,80.289 ccw(c53.092,81.255) 53.775,80.572 cw(c53.092,81.255) 53.092,80.289 ; 53.315,88.45 cw(c53.315,87.919) 53.69,88.295 ccw(c53.315,87.919) 53.315,88.45 ; 53.315,88.45 ccw(c53.315,88.982) 53.69,88.606 cw(c53.315,88.982) 53.315,88.45 ; 53.803,18.315 cw(c55.904,18.315) 54.419,19.8 ccw(c55.904,18.315) 53.803,18.315 ; 53.803,18.315 ccw(c51.703,18.315) 53.188,19.8 cw(c51.703,18.315) 53.803,18.315 ; 53.803,18.701 cw(c55.517,18.701) 54.305,19.913 ccw(c55.517,18.701) 53.803,18.701 ; 53.803,18.701 ccw(c52.089,18.701) 53.301,19.913 cw(c52.089,18.701) 53.803,18.701 ; 53.803,19.088 cw(c55.131,19.088) 54.192,20.026 ccw(c55.131,19.088) 53.803,19.088 ; 53.803,19.088 ccw(c52.476,19.088) 53.414,20.026 cw(c52.476,19.088) 53.803,19.088 ; 54.057,33.163 cw(c55.071,33.163) 54.478,33.985 ccw(c55.071,33.163) 54.057,33.163 ; 54.057,33.163 ccw(c53.044,33.163) 53.636,33.985 cw(c53.044,33.163) 54.057,33.163 ; 54.057,33.476 cw(c54.846,33.476) 54.385,34.115 ccw(c54.846,33.476) 54.057,33.476 ; 54.057,33.476 ccw(c53.269,33.476) 53.73,34.115 cw(c53.269,33.476) 54.057,33.476 ; 56.343,18.315 cw(c58.444,18.315) 56.959,19.8 ; 56.343,18.315 ccw(c54.243,18.315) 55.728,19.8 cw(c54.243,18.315) 56.343,18.315 ; 56.343,18.315 cw(c58.444,18.315) 56.959,19.8 ; 56.343,18.701 cw(c58.057,18.701) 56.845,19.913 ; 56.343,18.701 ccw(c54.629,18.701) 55.841,19.913 cw(c54.629,18.701) 56.343,18.701 ; 56.343,18.701 cw(c58.057,18.701) 56.845,19.913 ; 56.343,19.088 cw(c57.671,19.088) 56.732,20.026 ; 56.343,19.088 ccw(c55.016,19.088) 55.954,20.026 cw(c55.016,19.088) 56.343,19.088 ; 56.343,19.088 cw(c57.671,19.088) 56.732,20.026 ; 56.732,20.026 cw(c57.671,19.088) 57.671,20.415 ; 56.732,20.026 cw(c57.671,19.088) 57.671,20.415 ; 56.783,20.415 cw(c56.783,18.315) 58.268,19.8 ccw(c56.783,18.315) 56.783,20.415 ; 56.783,20.415 ccw(c56.783,22.516) 58.268,21.031 cw(c56.783,22.516) 56.783,20.415 ; 56.845,19.913 cw(c58.057,18.701) 58.057,20.415 ; 56.845,19.913 cw(c58.057,18.701) 58.057,20.415 ; 56.959,19.8 cw(c58.444,18.315) 58.444,20.415 ; 56.959,19.8 cw(c58.444,18.315) 58.444,20.415 ; 57.169,20.415 cw(c57.169,18.701) 58.381,19.913 ccw(c57.169,18.701) 57.169,20.415 ; 57.169,20.415 ccw(c57.169,22.129) 58.381,20.917 cw(c57.169,22.129) 57.169,20.415 ; 57.556,20.415 cw(c57.556,19.088) 58.494,20.026 ccw(c57.556,19.088) 57.556,20.415 ; 57.556,20.415 ccw(c57.556,21.743) 58.494,20.804 cw(c57.556,21.743) 57.556,20.415 ; 57.671,20.415 cw(c57.671,21.743) 56.732,20.804 ccw(c57.671,21.743) 57.671,20.415 ; 57.673,20.228 cw(c57.763,19.857) 58.105,20.027 ; 57.673,20.228 ccw(c57.558,20.699) 58.033,20.598 ; 57.673,20.228 cw(c57.763,19.857) 58.105,20.027 ; 57.673,20.228 ccw(c57.558,20.699) 58.033,20.598 ; 57.673,20.228 cw(c57.763,19.857) 58.105,20.027 ; 57.673,20.228 ccw(c57.558,20.699) 58.033,20.598 ; 57.673,20.603 cw(c57.558,20.132) 58.033,20.233 ; 57.673,20.603 ccw(c57.763,20.974) 58.105,20.804 ; 57.673,20.603 cw(c57.558,20.132) 58.033,20.233 ; 57.673,20.603 ccw(c57.763,20.974) 58.105,20.804 ; 57.673,20.603 cw(c57.558,20.132) 58.033,20.233 ; 57.673,20.603 ccw(c57.763,20.974) 58.105,20.804 ; 57.85,20.378 cw(c57.877,20.227) 58.028,20.255 ; 57.85,20.378 ccw(c57.812,20.59) 58.025,20.556 ; 57.85,20.378 cw(c57.877,20.227) 58.028,20.255 ; 57.85,20.378 ccw(c57.812,20.59) 58.025,20.556 ; 57.85,20.378 cw(c57.877,20.227) 58.028,20.255 ; 57.85,20.378 ccw(c57.812,20.59) 58.025,20.556 ; 57.85,20.453 cw(c57.812,20.24) 58.025,20.275 ; 57.85,20.453 ccw(c57.877,20.604) 58.028,20.576 ; 57.85,20.453 cw(c57.812,20.24) 58.025,20.275 ; 57.85,20.453 ccw(c57.877,20.604) 58.028,20.576 ; 57.85,20.453 cw(c57.812,20.24) 58.025,20.275 ; 57.85,20.453 ccw(c57.877,20.604) 58.028,20.576 ; 57.868,20.275 cw(c57.947,19.949) 58.248,20.099 ; 57.868,20.275 cw(c57.947,19.949) 58.248,20.099 ; 57.868,20.275 cw(c57.947,19.949) 58.248,20.099 ; 57.868,20.556 ccw(c57.947,20.882) 58.248,20.732 ; 57.868,20.556 ccw(c57.947,20.882) 58.248,20.732 ; 57.868,20.556 ccw(c57.947,20.882) 58.248,20.732 ; 57.921,20.288 ccw(c57.835,20.64) 58.189,20.564 ; 57.921,20.288 ccw(c57.835,20.64) 58.189,20.564 ; 57.921,20.288 ccw(c57.835,20.64) 58.189,20.564 ; 57.921,20.543 cw(c57.835,20.191) 58.189,20.267 ; 57.921,20.543 cw(c57.835,20.191) 58.189,20.267 ; 57.921,20.543 cw(c57.835,20.191) 58.189,20.267 ; 58.057,20.415 cw(c58.057,22.129) 56.845,20.917 ccw(c58.057,22.129) 58.057,20.415 ; 58.444,20.415 cw(c58.444,22.516) 56.959,21.031 ccw(c58.444,22.516) 58.444,20.415 ; 59.035,83.662 cw(c58.659,83.287) 59.191,83.287 ccw(c58.659,83.287) 59.035,83.662 ; 59.035,83.662 ccw(c59.411,84.038) 59.411,83.507 cw(c59.411,84.038) 59.035,83.662 ; 59.323,20.415 cw(c59.323,18.315) 60.808,19.8 ccw(c59.323,18.315) 59.323,20.415 ; 59.323,20.415 ccw(c59.323,22.516) 60.808,21.031 cw(c59.323,22.516) 59.323,20.415 ; 59.709,20.415 cw(c59.709,18.701) 60.921,19.913 ccw(c59.709,18.701) 59.709,20.415 ; 59.709,20.415 ccw(c59.709,22.129) 60.921,20.917 cw(c59.709,22.129) 59.709,20.415 ; 60.096,20.415 cw(c60.096,19.088) 61.034,20.026 ccw(c60.096,19.088) 60.096,20.415 ; 60.096,20.415 ccw(c60.096,21.743) 61.034,20.804 cw(c60.096,21.743) 60.096,20.415 ; 60.211,20.415 cw(c60.211,21.743) 59.272,20.804 ccw(c60.211,21.743) 60.211,20.415 ; 60.211,20.415 ccw(c60.211,19.088) 59.272,20.026 cw(c60.211,19.088) 60.211,20.415 ; 60.213,20.228 cw(c60.303,19.857) 60.645,20.027 ; 60.213,20.228 ccw(c60.098,20.699) 60.573,20.598 ; 60.213,20.228 cw(c60.303,19.857) 60.645,20.027 ; 60.213,20.228 ccw(c60.098,20.699) 60.573,20.598 ; 60.213,20.228 cw(c60.303,19.857) 60.645,20.027 ; 60.213,20.228 ccw(c60.098,20.699) 60.573,20.598 ; 60.213,20.603 cw(c60.098,20.132) 60.573,20.233 ; 60.213,20.603 ccw(c60.303,20.974) 60.645,20.804 ; 60.213,20.603 cw(c60.098,20.132) 60.573,20.233 ; 60.213,20.603 ccw(c60.303,20.974) 60.645,20.804 ; 60.213,20.603 cw(c60.098,20.132) 60.573,20.233 ; 60.213,20.603 ccw(c60.303,20.974) 60.645,20.804 ; 60.351,56.032 cw(c60.351,54.382) 61.598,55.463 ccw(c60.351,54.382) 60.351,56.032 ; 60.351,56.032 ccw(c60.351,57.683) 61.598,56.602 cw(c60.351,57.683) 60.351,56.032 ; 60.39,20.378 cw(c60.417,20.227) 60.568,20.255 ; 60.39,20.378 ccw(c60.352,20.59) 60.565,20.556 ; 60.39,20.378 cw(c60.417,20.227) 60.568,20.255 ; 60.39,20.378 ccw(c60.352,20.59) 60.565,20.556 ; 60.39,20.378 cw(c60.417,20.227) 60.568,20.255 ; 60.39,20.378 ccw(c60.352,20.59) 60.565,20.556 ; 60.39,20.453 cw(c60.352,20.24) 60.565,20.275 ; 60.39,20.453 ccw(c60.417,20.604) 60.568,20.576 ; 60.39,20.453 cw(c60.352,20.24) 60.565,20.275 ; 60.39,20.453 ccw(c60.417,20.604) 60.568,20.576 ; 60.39,20.453 cw(c60.352,20.24) 60.565,20.275 ; 60.39,20.453 ccw(c60.417,20.604) 60.568,20.576 ; 60.408,20.275 cw(c60.487,19.949) 60.788,20.099 ; 60.408,20.275 cw(c60.487,19.949) 60.788,20.099 ; 60.408,20.275 cw(c60.487,19.949) 60.788,20.099 ; 60.408,20.556 ccw(c60.487,20.882) 60.788,20.732 ; 60.408,20.556 ccw(c60.487,20.882) 60.788,20.732 ; 60.408,20.556 ccw(c60.487,20.882) 60.788,20.732 ; 60.427,76.505 cw(c61.289,75.642) 61.853,76.724 ccw(c61.289,75.642) 60.427,76.505 ; 60.452,81.559 cw(c61.326,80.685) 61.872,81.795 ccw(c61.326,80.685) 60.452,81.559 ; 60.461,20.288 ccw(c60.375,20.64) 60.729,20.564 ; 60.461,20.288 ccw(c60.375,20.64) 60.729,20.564 ; 60.461,20.288 ccw(c60.375,20.64) 60.729,20.564 ; 60.461,20.543 cw(c60.375,20.191) 60.729,20.267 ; 60.461,20.543 cw(c60.375,20.191) 60.729,20.267 ; 60.461,20.543 cw(c60.375,20.191) 60.729,20.267 ; 60.597,20.415 cw(c60.597,22.129) 59.385,20.917 ccw(c60.597,22.129) 60.597,20.415 ; 60.597,20.415 ccw(c60.597,18.701) 59.385,19.913 cw(c60.597,18.701) 60.597,20.415 ; 60.701,56.032 cw(c60.701,54.686) 61.719,55.567 ccw(c60.701,54.686) 60.701,56.032 ; 60.701,56.032 ccw(c60.701,57.379) 61.719,56.497 cw(c60.701,57.379) 60.701,56.032 ; 60.984,20.415 cw(c60.984,22.516) 59.499,21.031 ccw(c60.984,22.516) 60.984,20.415 ; 60.984,20.415 ccw(c60.984,18.315) 59.499,19.8 cw(c60.984,18.315) 60.984,20.415 ; 60.985,74.955 cw(c60.985,74.464) 61.444,74.641 ccw(c60.985,74.464) 60.985,74.955 ; 60.985,74.955 ccw(c60.985,75.447) 61.444,75.27 cw(c60.985,75.447) 60.985,74.955 ; 61.051,56.032 cw(c61.051,54.989) 61.84,55.672 ccw(c61.051,54.989) 61.051,56.032 ; 61.051,56.032 ccw(c61.051,57.076) 61.84,56.393 cw(c61.051,57.076) 61.051,56.032 ; 61.062,50.952 cw(c61.062,50.568) 61.427,50.686 ccw(c61.062,50.568) 61.062,50.952 ; 61.062,50.952 ccw(c61.062,51.336) 61.427,51.219 cw(c61.062,51.336) 61.062,50.952 ; 61.219,74.955 cw(c61.219,74.554) 61.593,74.699 ccw(c61.219,74.554) 61.219,74.955 ; 61.219,74.955 ccw(c61.219,75.357) 61.593,75.212 cw(c61.219,75.357) 61.219,74.955 ; 61.264,53.492 cw(c62.255,52.501) 62.255,53.902 ccw(c62.255,52.501) 61.264,53.492 ; 61.265,53.492 cw(c61.265,53.363) 61.393,53.38 ccw(c61.265,53.363) 61.265,53.492 ; 61.265,53.492 ccw(c61.265,53.621) 61.393,53.605 cw(c61.265,53.621) 61.265,53.492 ; 61.281,50.952 cw(c61.281,50.639) 61.58,50.735 ccw(c61.281,50.639) 61.281,50.952 ; 61.281,50.952 ccw(c61.281,51.266) 61.58,51.17 cw(c61.281,51.266) 61.281,50.952 ; 2.99,49.422 cw(c4.545,49.422) 3.446,50.522 ccw(c4.545,49.422) 2.99,49.422 ; 3.13,83.082 ccw(c3.13,84.206) 3.925,83.412 cw(c3.13,84.206) 3.13,83.082 ; 3.13,83.242 ccw(c3.13,84.753) 4.198,83.685 cw(c3.13,84.753) 3.13,83.242 ; 3.15,49.422 cw(c5.091,49.422) 3.719,50.795 ccw(c5.091,49.422) 3.15,49.422 ; 3.31,49.422 cw(c5.638,49.422) 3.992,51.068 ccw(c5.638,49.422) 3.31,49.422 ; 3.47,49.422 cw(c6.184,49.422) 4.265,51.341 ccw(c6.184,49.422) 3.47,49.422 ; 3.618,82.531 cw(c4.471,82.722) 3.853,83.34 ccw(c4.471,82.722) 3.618,82.531 ; 3.63,49.422 cw(c6.73,49.422) 4.538,51.614 ccw(c6.73,49.422) 3.63,49.422 ; 3.679,71.79 ccw(c4.016,72.016) 4.016,71.61 cw(c4.016,72.016) 3.679,71.79 ; 3.775,82.566 cw(c4.808,82.797) 4.059,83.546 ccw(c4.808,82.797) 3.775,82.566 ; 3.782,71.316 cw(c4.128,71.26) 4.128,71.61 ccw(c4.128,71.26) 3.782,71.316 ; 3.79,49.422 cw(c7.277,49.422) 4.811,51.887 ccw(c7.277,49.422) 3.79,49.422 ; 3.95,49.422 cw(c7.823,49.422) 5.085,52.161 ccw(c7.823,49.422) 3.95,49.422 ; v1@14.704,62.559 ccw(c14.704,62.906) 14.95,62.661 cw(c14.704,62.906) v1@14.704,62.559 ; v1@17.465,46.041 cw(c17.751,45.754) 17.751,46.159 ccw(c17.751,45.754) v1@17.465,46.041 ; v1@17.578,45.928 cw(c18.137,45.368) 18.137,46.159 ccw(c18.137,45.368) v1@17.578,45.928 ; v1@17.578,46.239 ccw(c17.769,46.43) 17.769,46.159 cw(c17.769,46.43) v1@17.578,46.239 ; 19.677,20.415 ccw(c21.054,20.415) 20.081,19.442 cw(c21.054,20.415) 19.677,20.415 ; 19.767,19.545 cw(c19.767,19.039) 20.125,19.397 ccw(c19.767,19.039) 19.767,19.545 ; 19.837,20.415 ccw(c21.601,20.415) 20.354,19.169 cw(c21.601,20.415) 19.837,20.415 ; 19.997,20.415 ccw(c22.147,20.415) 20.627,18.895 cw(c22.147,20.415) 19.997,20.415 ; 20.157,20.415 ccw(c22.693,20.415) 20.9,18.622 cw(c22.693,20.415) 20.157,20.415 ; 20.317,20.415 ccw(c23.24,20.415) 21.173,18.349 cw(c23.24,20.415) 20.317,20.415 ; 20.477,20.415 ccw(c23.786,20.415) 21.446,18.076 cw(c23.786,20.415) 20.477,20.415 ; 20.637,20.415 ccw(c24.332,20.415) 21.72,17.803 cw(c24.332,20.415) 20.637,20.415 ; v1@23.953,54.487 cw(c24.39,54.051) 24.39,54.668 ccw(c24.39,54.051) v1@23.953,54.487 ; v1@23.953,54.799 ccw(c24.267,55.113) 24.267,54.668 cw(c24.267,55.113) v1@23.953,54.799 ; 24.847,19.545 cw(c24.847,19.285) 25.032,19.469 ccw(c24.847,19.285) 24.847,19.545 ; 24.908,20.381 ccw(c25.575,20.007) 25.034,19.466 cw(c25.575,20.007) 24.908,20.381 ; 25.048,20.303 ccw(c25.766,19.9) 25.184,19.317 cw(c25.766,19.9) 25.048,20.303 ; 25.187,20.224 ccw(c25.958,19.792) 25.333,19.168 cw(c25.958,19.792) 25.187,20.224 ; 25.327,20.146 ccw(c26.149,19.685) 25.482,19.018 cw(c26.149,19.685) 25.327,20.146 ; 25.467,20.068 ccw(c26.34,19.577) 25.632,18.869 cw(c26.34,19.577) 25.467,20.068 ; v1@27.929,81.101 ccw(c28.216,81.388) 28.216,80.983 cw(c28.216,81.388) v1@27.929,81.101 ; v1@28.043,80.903 cw(c28.234,80.712) 28.234,80.983 ccw(c28.234,80.712) v1@28.043,80.903 ; v1@28.043,81.215 ccw(c28.602,81.774) 28.602,80.983 cw(c28.602,81.774) v1@28.043,81.215 ; 33.921,19.29 ccw(c32.988,20.222) 34.301,20.348 cw(c32.988,20.222) 33.921,19.29 ; 33.936,19.306 cw(c34.907,18.335) 34.973,19.706 ccw(c34.907,18.335) 33.936,19.306 ; 34.135,35.589 ccw(c34.135,37.052) 35.17,36.018 cw(c34.135,37.052) 34.135,35.589 ; 34.135,35.749 ccw(c34.135,37.599) 35.443,36.291 cw(c34.135,37.599) 34.135,35.749 ; 34.135,35.909 ccw(c34.135,38.145) 35.716,36.564 cw(c34.135,38.145) 34.135,35.909 ; 34.135,36.069 ccw(c34.135,38.691) 35.989,36.837 cw(c34.135,38.691) 34.135,36.069 ; 34.135,36.229 ccw(c34.135,39.238) 36.262,37.11 cw(c34.135,39.238) 34.135,36.229 ; 34.135,36.389 ccw(c34.135,39.784) 36.536,37.384 cw(c34.135,39.784) 34.135,36.389 ; 34.135,36.549 ccw(c34.135,40.33) 36.809,37.657 cw(c34.135,40.33) 34.135,36.549 ; 34.135,36.709 ccw(c34.135,40.876) 37.082,37.93 cw(c34.135,40.876) 34.135,36.709 ; 34.135,36.869 ccw(c34.135,41.423) 37.355,38.203 cw(c34.135,41.423) 34.135,36.869 ; 34.161,19.53 ccw(c33.427,20.264) 34.46,20.363 cw(c33.427,20.264) 34.161,19.53 ; 34.192,19.561 cw(c34.931,18.822) 34.981,19.866 ccw(c34.931,18.822) 34.192,19.561 ; 34.626,11.37 cw(c34.626,11.119) 34.804,11.297 ccw(c34.626,11.119) 34.626,11.37 ; 34.818,11.945 ccw(c35.249,11.618) 34.866,11.235 cw(c35.249,11.618) 34.818,11.945 ; 34.945,11.849 ccw(c35.397,11.506) 34.996,11.105 cw(c35.397,11.506) 34.945,11.849 ; 35.072,11.752 ccw(c35.544,11.394) 35.125,10.976 cw(c35.544,11.394) 35.072,11.752 ; 38.745,82.6 ccw(c39.022,83.479) 39.673,82.828 cw(c39.022,83.479) 38.745,82.6 ; v1@38.791,17.394 cw(c39.234,16.951) 39.234,17.577 ccw(c39.234,16.951) v1@38.791,17.394 ; 38.793,82.753 ccw(c39.111,83.763) 39.86,83.014 cw(c39.111,83.763) 38.793,82.753 ; 38.841,82.906 ccw(c39.201,84.046) 40.046,83.201 cw(c39.201,84.046) 38.841,82.906 ; 38.889,83.058 ccw(c39.29,84.33) 40.233,83.387 cw(c39.29,84.33) 38.889,83.058 ; v1@38.904,17.28 cw(c39.62,16.565) 39.62,17.577 ccw(c39.62,16.565) v1@38.904,17.28 ; 38.938,83.211 ccw(c39.379,84.614) 40.419,83.574 cw(c39.379,84.614) 38.938,83.211 ; 38.986,83.364 ccw(c39.469,84.898) 40.606,83.76 cw(c39.469,84.898) 38.986,83.364 ; 38.987,44.899 ccw(c39.624,45.536) 39.624,44.635 cw(c39.624,45.536) 38.987,44.899 ; v1@39.018,17.167 cw(c40.006,16.178) 40.006,17.577 ccw(c40.006,16.178) v1@39.018,17.167 ; 39.1,45.012 ccw(c40.01,45.922) 40.01,44.635 cw(c40.01,45.922) 39.1,45.012 ; 39.1,64.767 cw(c39.863,64.004) 39.863,65.082 ccw(c39.863,64.004) 39.1,64.767 ; 39.1,65.332 ccw(c39.703,65.935) 39.703,65.082 cw(c39.703,65.935) 39.1,65.332 ; 39.1,67.307 cw(c39.863,66.544) 39.863,67.622 ccw(c39.863,66.544) 39.1,67.307 ; 39.1,67.872 ccw(c39.703,68.475) 39.703,67.622 cw(c39.703,68.475) 39.1,67.872 ; 39.1,80.007 cw(c39.679,79.428) 39.679,80.246 ccw(c39.679,79.428) 39.1,80.007 ; 39.1,80.572 ccw(c39.887,81.359) 39.887,80.246 cw(c39.887,81.359) 39.1,80.572 ; 39.213,44.333 cw(c39.942,43.604) 39.942,44.635 ccw(c39.942,43.604) 39.213,44.333 ; 39.213,45.125 ccw(c40.396,46.308) 40.396,44.635 cw(c40.396,46.308) 39.213,45.125 ; 39.213,64.653 cw(c40.249,63.618) 40.249,65.082 ccw(c40.249,63.618) 39.213,64.653 ; 39.213,65.445 ccw(c40.09,66.322) 40.09,65.082 cw(c40.09,66.322) 39.213,65.445 ; 39.213,67.193 cw(c40.249,66.158) 40.249,67.622 ccw(c40.249,66.158) 39.213,67.193 ; 39.213,67.985 ccw(c40.09,68.862) 40.09,67.622 cw(c40.09,68.862) 39.213,67.985 ; 39.213,79.893 cw(c40.065,79.042) 40.065,80.246 ccw(c40.065,79.042) 39.213,79.893 ; 39.213,80.685 ccw(c40.274,81.746) 40.274,80.246 cw(c40.274,81.746) 39.213,80.685 ; 39.327,44.22 cw(c40.329,43.218) 40.329,44.635 ccw(c40.329,43.218) 39.327,44.22 ; 39.327,45.239 ccw(c40.783,46.695) 40.783,44.635 cw(c40.783,46.695) 39.327,45.239 ; 39.327,64.54 cw(c40.635,63.232) 40.635,65.082 ccw(c40.635,63.232) 39.327,64.54 ; 39.327,65.559 ccw(c40.476,66.708) 40.476,65.082 cw(c40.476,66.708) 39.327,65.559 ; 39.327,67.08 cw(c40.635,65.772) 40.635,67.622 ccw(c40.635,65.772) 39.327,67.08 ; 39.327,68.099 ccw(c40.476,69.248) 40.476,67.622 cw(c40.476,69.248) 39.327,68.099 ; 39.327,79.78 cw(c40.451,78.655) 40.451,80.246 ccw(c40.451,78.655) 39.327,79.78 ; 39.327,80.799 ccw(c40.66,82.132) 40.66,80.246 cw(c40.66,82.132) 39.327,80.799 ; 39.401,11.621 cw(c39.071,11.115) 39.675,11.115 ccw(c39.071,11.115) 39.401,11.621 ; 39.675,11.09 cw(c40.256,11.09) 39.976,11.6 ccw(c40.256,11.09) 39.675,11.09 ; 40.172,58.732 cw(c40.172,58.115) 40.609,58.551 ccw(c40.172,58.115) 40.172,58.732 ; 40.295,58.732 ccw(c40.295,59.177) 40.609,58.863 cw(c40.295,59.177) 40.295,58.732 ; 41.666,42.189 ccw(c41.666,43.354) 42.489,42.53 cw(c41.666,43.354) 41.666,42.189 ; v1@41.936,44.48 cw(c42.355,44.061) 42.355,44.653 ccw(c42.355,44.061) v1@41.936,44.48 ; v1@41.936,44.791 ccw(c42.269,45.124) 42.269,44.653 cw(c42.269,45.124) v1@41.936,44.791 ; 42.052,42.189 ccw(c42.052,42.967) 42.602,42.417 cw(c42.052,42.967) 42.052,42.189 ; 42.533,61.314 ccw(c42.245,61.603) 42.653,61.603 cw(c42.245,61.603) 42.533,61.314 ; 42.773,14.123 ccw(c43.409,14.759) 43.409,13.86 cw(c43.409,14.759) 42.773,14.123